# Altium PCB PCB1.PcbDoc (part 4 of 4)
Units mil, origin at the board's own origin, x right, y up, seen from the top; angles counter-clockwise.
Board outline 3904 x 3805 mil, 4 copper layers (Top Layer, Layer 2, Layer 3, Bottom Layer), stack 23.756 mil thick; 231 components, 342 nets, 1187 pads, 543 vias.
Unrouted connection lines stored in the file: 4.
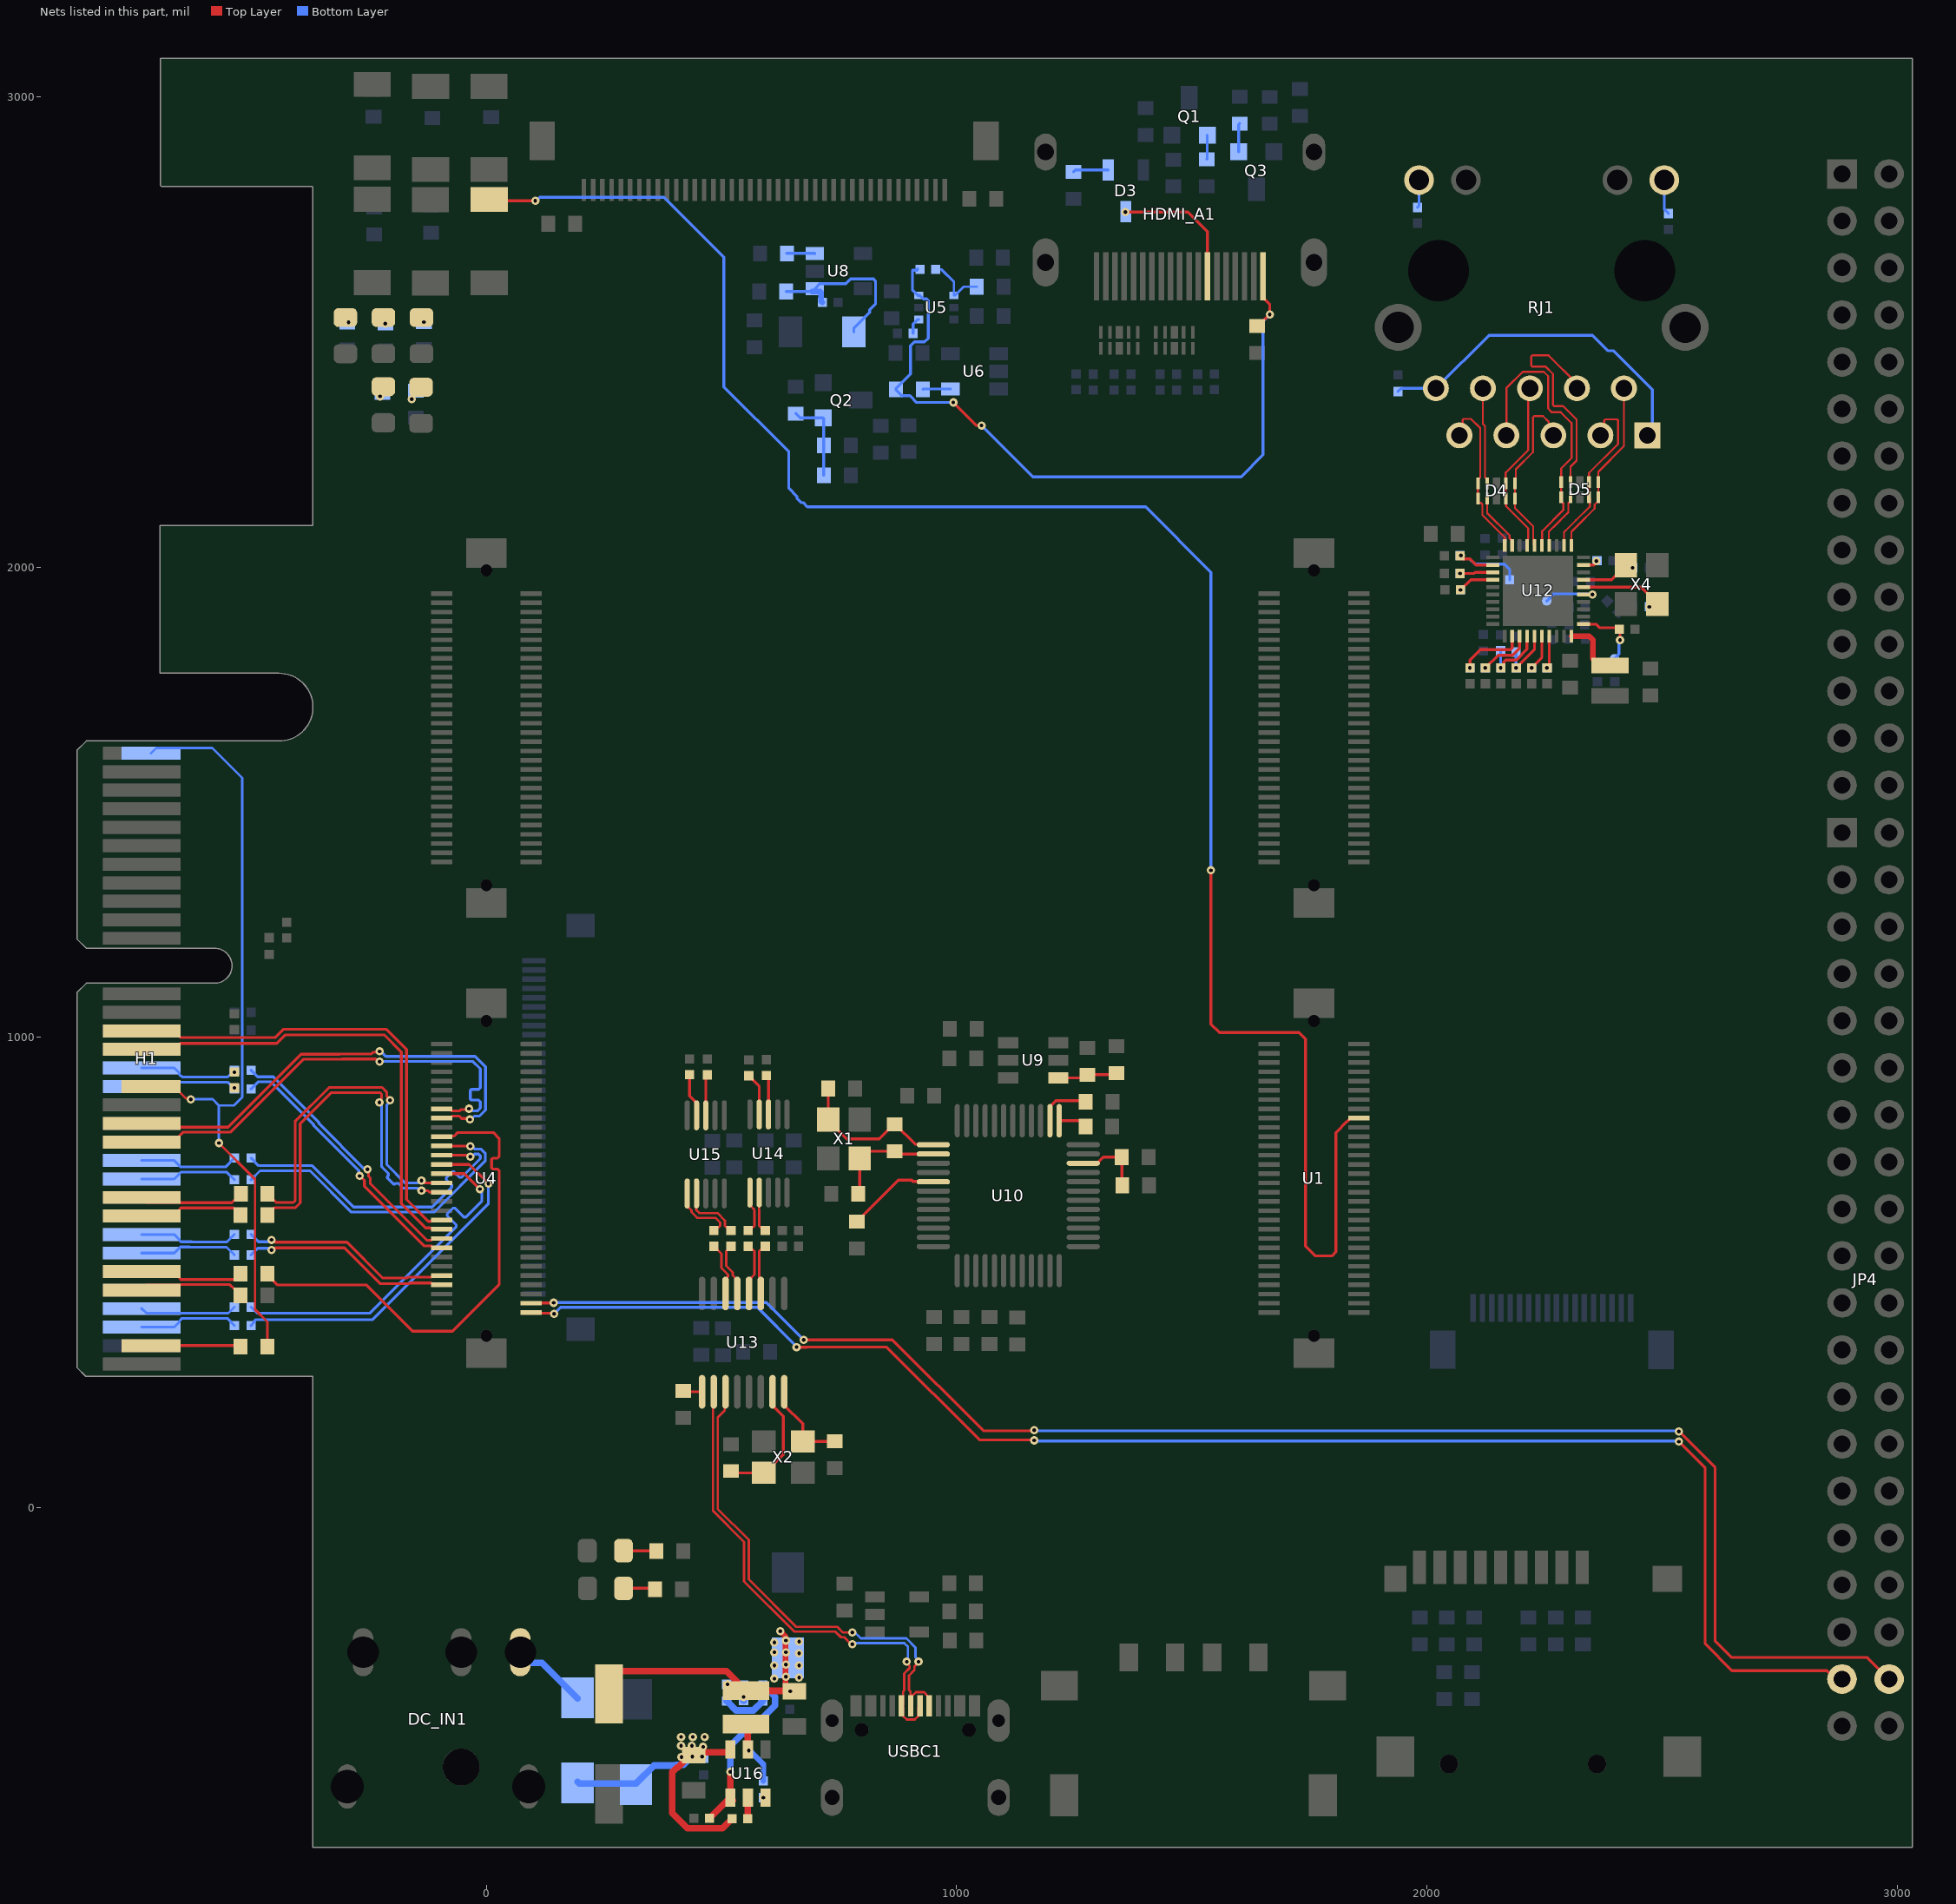
[diagram p6: the nets of this part, all layers, seen from the top]

## Via types
v1: diameter 17.7, hole 7.9, Top Layer to Bottom Layer, tented both sides, 543 vias

## Nets (pads, with @x,y where several pads share a name; then routed paths per layer and width w, separated by ;. In a path a pad name is that pad's centre, name@x,y a point inside that pad or via, vN(x,y) a via of type N, cw(c..) or ccw(c..) an arc to the next point about the centre after c; other vN are vias at no path point) (continued)
MGT_RX_N_0_R: H1.B28 R111.2 | length 225.5
  Top Layer w5.88: H1.B28@-733,462.28 -722.16,473.12 -650.7,473.12 -649.82,474 -546,474 -536.79,464.79 -534.82,464.79 -523,452.97 R111.2@-523,451
MGT_RX_N_1: R101.1 U4.27 | length 770
  Top Layer w5.88: R101.1@-465.91,622 -465.91,623.97 -454.09,635.79 -452.12,635.79 -450.12,637.79 -405.86,637.79 -396.04,647.61 -396.04,816.29 -329.9,882.43 -226.46,882.43 -223.02,878.98 -223.02,870.33 -223.85,869.5 -223.85,868.18 -227.64,864.39 v1(-227.64,861.19) ; v1(-138,673.6) -124.17,673.6 -121.04,670.46 U4.27@-95.46,670.46
  Bottom Layer w5.88: v1(-227.64,861.19) -227.64,857.99 -222.88,853.23 -222.88,724.49 -218.35,719.96 -216.27,717.89 -208.82,710.44 -208.82,705.56 -210.55,703.84 -210.55,700.6 -197.61,687.66 -194.37,687.66 -192.64,689.39 -187.77,689.39 -185.69,687.31 -177.39,679.01 -146.61,679.01 -141.2,673.6 v1(-138,673.6)
MGT_RX_N_1_R: H1.B24 R101.2 | length 226.4
  Top Layer w5.88: H1.B24@-733,619.76 -664.1,619.76 -653.26,630.6 -653.26,633.68 -649.82,637.12 -538.12,637.12 -536.79,635.79 -534.82,635.79 -523,623.97 R101.2@-523,622
MGT_RX_N_2: H1.B20 U4.45 | length 1013.8
  Top Layer w5.88: H1.B20@-733,777.24 -664.1,777.24 -653.26,788.08 -653.26,790.14 -649.33,794.07 -649.27,794.07 -645.34,798 -545,798 -390,953 -307.76,953 -307.05,953.71 -235.61,953.71 -229.88,947.98 v1(-227.32,947.98) ; U4.45@-95.46,847.63 -77.75,847.63 -73.34,843.22 -57.61,843.22 -54.67,846.17 -38.83,846.17 v1(-37,848)
  Bottom Layer w5.88: v1(-227.32,947.98) -226.95,948.35 -28.35,948.35 -12.88,932.88 -12.88,918.44 -12.88,892.62 -16.32,889.17 -32.07,889.17 -34.36,886.89 -34.36,868.58 -32.07,866.29 -16.32,866.29 -12.88,862.85 -12.88,857.77 -12.88,849.7 -19.33,843.25 -29.05,843.25 -33.8,848 v1(-37,848)
MGT_RX_N_3: H1.B15 U4.19 | length 1010.4
  Top Layer w5.88: H1.B15@-733,974.09 -664.1,974.09 -651.26,986.94 -445.73,986.94 -427.54,1005.12 -217.51,1005.12 -180.88,968.49 -180.88,646.2 -129.25,594.57 -119.37,594.57 -118.5,593.7 -97.45,593.7 U4.19@-95.47,591.72
MGT_RX_P_0: R110.1 U4.39 | length 1053.3
  Top Layer w5.88: R110.1@-465.91,497 -465.91,495.03 -443.88,473 -255,473 -157,375 -72,375 27,474 27,704 27,716.41 23.56,719.86 13.2,719.86 10.91,722.14 10.91,740.45 13.2,742.74 23.56,742.74 27,746.18 27,772 27,785 14.62,797.38 -61.08,797.38 -68.54,789.92 -94.12,789.92 U4.39@-95.46,788.57
MGT_RX_P_0_R: H1.B27 R110.2 | length 223.6
  Top Layer w5.88: H1.B27@-733,501.65 -664.1,501.65 -653.26,490.81 -653.26,488.32 -649.82,484.88 -534.82,484.88 -523,496.7 R110.2@-523,497
MGT_RX_P_1: R87.1 U4.29 | length 763.7
  Top Layer w5.88: R87.1@-465.46,667 -465.46,665.03 -453.63,653.21 -451.66,653.21 -447.13,648.67 -410.37,648.67 -406.92,652.12 -406.92,820.8 -334.41,893.31 -221.96,893.31 -212.14,883.49 -212.14,875.35 -205,868.22 v1(-205,866) ; v1(-138,695.3) -132.85,690.15 U4.29@-95.46,690.15
  Bottom Layer w5.88: v1(-205,866) -205,862.8 -212,855.8 -212,729 -172.89,689.89 -146.61,689.89 -141.2,695.3 v1(-138,695.3)
MGT_RX_P_1_R: H1.B23 R87.2 | length 224.1
  Top Layer w5.88: H1.B23@-733,659.13 -722.16,648.29 -650.11,648.29 -649.82,648 -541.54,648 -536.34,653.21 -534.37,653.21 -522.54,665.03 R87.2@-522.54,667
MGT_RX_P_2: H1.B19 U4.43 | length 1013.3
  Top Layer w5.88: H1.B19@-733,816.61 -725.27,808.88 -661.02,808.88 -549.51,808.88 -394.51,963.88 -312.27,963.88 -311.56,964.59 -244.6,964.59 -241.43,967.76 -229.24,967.76 v1(-227,970) ; U4.43@-95.46,827.94 -77.75,827.94 -73.34,832.34 -57.61,832.34 -52.53,827.26 -37.26,827.26 v1(-35,825)
  Bottom Layer w5.88: v1(-227,970) -224.73,970 -213.96,959.23 -23.84,959.23 -2,937.39 -2,845.19 -14.82,832.37 -25.65,832.37 -33.01,825 v1(-35,825)
MGT_RX_P_3: H1.B14 U4.21 | length 1007.8
  Top Layer w5.88: H1.B14@-733,1013.46 -664.1,1013.46 -649.85,999.21 -449.79,999.21 -432.33,1016.67 -212.72,1016.67 -170,973.95 -170,655 -123.49,608.49 -118.61,608.49 -117.68,609.42 -97.45,609.42 U4.21@-95.47,611.4
MGT_TX_N_0: C59.1 U4.33 | length 773
  Top Layer w5.88: U4.33@-95.46,729.52 -36.53,729.52 v1(4.25,688.73)
  Bottom Layer w5.88: C59.1@-500.57,387 -493.67,393.9 -493.67,396.12 -490.22,399.56 -241.82,399.56 3.97,645.35 3.97,688.45 v1(4.25,688.73)
MGT_TX_N_0_R: C59.2 H1.A30 | length 212.2
  Bottom Layer w5.88: H1.A30@-733,383.54 -664.1,383.54 -653.26,394.38 -653.26,396.38 -647.45,402.19 -551.19,402.19 C59.2@-536,387
MGT_TX_N_1: C57.1 U4.7 | length 448.5
  Top Layer w5.88: v1(-457,547.3) -453.8,547.3 -449.03,552.07 -301.69,552.07 -225.27,475.66 -164.63,475.66 -162.91,477.38 -116.95,477.38 -113.18,473.61 U4.7@-95.47,473.61
  Bottom Layer w5.88: C57.1@-500.57,537 -486.36,551.21 -464.11,551.21 -460.2,547.3 v1(-457,547.3)
MGT_TX_N_1_R: C57.2 H1.A26 | length 209.5
  Bottom Layer w5.88: H1.A26@-733,541.02 -664.1,541.02 -651.01,554.12 -630.93,554.12 -630.37,553.56 -552.56,553.56 C57.2@-536,537
MGT_TX_N_2: C55.1 U4.37 | length 703.3
  Top Layer w5.88: U4.37@-95.46,768.89 -34.89,768.89 v1(-34,768)
  Bottom Layer w5.88: C55.1@-500.57,697 -481.57,716 -375,716 -287.12,628.12 -111.31,628.12 -2.07,737.35 -2.07,752.44 -11.89,762.26 -25.06,762.26 -30.8,768 v1(-34,768)
MGT_TX_N_2_R: C55.2 H1.A22 | length 209.8
  Bottom Layer w5.88: H1.A22@-733,698.5 -664.1,698.5 -653.26,709.34 -653.26,709.56 -649.82,713 -552,713 C55.2@-536,697
MGT_TX_N_3: C53.1 U4.15 | length 571.3
  Top Layer w5.88: v1(-269.57,704.98) -268.83,704.98 -259.47,695.63 -259.47,683.42 -132.05,556.01 -116.84,556.01 -113.18,552.35 U4.15@-95.47,552.35
  Bottom Layer w5.88: C53.1@-500.57,890 -485.56,905.01 -458.01,905.01 -367.46,814.46 -367.46,812.37 -271.43,716.34 -271.43,706.85 v1(-269.57,704.98)
MGT_TX_N_3_R: C53.2 H1.A17 R86.2 | length 206.8
  Bottom Layer w5.88: H1.A17@-733,895.35 -723.79,904.56 -550.56,904.56 C53.2@-536,890
  other v1: -536,892.27
MGT_TX_P_0: C58.1 U4.31 | length 775.9
  Top Layer w5.88: U4.31@-95.47,709.83 -46.83,709.83 v1(-14,677)
  Bottom Layer w5.88: C58.1@-500.57,426 -488.01,413.44 -247.57,413.44 -66.51,594.51 -64.43,596.58 -64.43,601.46 -83.58,620.61 -83.58,623.85 -70.64,636.79 -67.4,636.79 -48.25,617.63 -43.38,617.63 -21.01,640.01 -9.91,651.1 -9.91,669.71 -14,673.8 v1(-14,677)
MGT_TX_P_0_R: C58.2 H1.A29 | length 206.4
  Bottom Layer w5.88: H1.A29@-733,422.91 -723.16,413.07 -548.93,413.07 C58.2@-536,426
MGT_TX_P_1: C56.1 U4.9 | length 449.2
  Top Layer w5.88: v1(-457,569) -453.8,569 -449.03,564.22 -296.66,564.22 -220.24,487.81 -169.67,487.81 -167.94,489.53 -116.95,489.53 -113.18,493.3 U4.9@-95.47,493.3
  Bottom Layer w5.88: C56.1@-500.57,581 -484.66,565.09 -464.11,565.09 -460.2,569 v1(-457,569)
MGT_TX_P_1_R: C56.2 H1.A25 | length 211.1
  Bottom Layer w5.88: H1.A25@-733,580.39 -664.1,580.39 -653.26,569.55 -653.26,568.44 -649.82,565 -626.42,565 -625.86,564.44 -552.56,564.44 C56.2@-536,581
MGT_TX_P_2: C54.1 U4.35 | length 704.9
  Top Layer w5.88: U4.35@-95.46,749.2 -40.73,749.2 -37.26,745.74 v1(-34.07,745.74)
  Bottom Layer w5.88: C54.1@-500.57,743 -484.45,726.88 -370.49,726.88 -282.61,639 -115.81,639 -75.91,678.91 -73.83,680.99 -73.83,685.86 -85.52,697.55 -85.52,700.79 -72.58,713.73 -69.35,713.73 -57.65,702.04 -52.78,702.04 -36.91,717.91 -12.95,741.86 -12.95,747.93 -16.4,751.38 -25.22,751.38 -30.87,745.74 v1(-34.07,745.74)
MGT_TX_P_2_R: C54.2 H1.A21 | length 210.6
  Bottom Layer w5.88: H1.A21@-733,737.87 -664.1,737.87 -650.23,724 -555,724 C54.2@-536,743
MGT_TX_P_3: C52.1 U4.17 | length 572
  Top Layer w5.88: v1(-253,719) -250.74,716.74 -250.74,704.41 -247.09,700.76 -247.09,688.55 -126.93,568.39 -116.84,568.39 -113.18,572.04 U4.17@-95.47,572.04
  Bottom Layer w5.88: C52.1@-500.57,930 -486.46,915.89 -453.5,915.89 -356.58,818.97 -356.58,816.87 -260.97,721.26 -255.26,721.26 v1(-253,719)
MGT_TX_P_3_R: C52.2 H1.A16 R86.1 | length 212.8
  Bottom Layer w5.88: H1.A16@-733,934.72 -664.1,934.72 -653.26,923.88 -653.26,920.83 -649.82,917.38 -648.76,917.38 -646.81,915.44 -613.34,915.44 -550.56,915.44 C52.2@-536,930
  other v1: -536,925.73
NetC6_1: C6.1 R23.1 U10.2 X1.1 | length 241.9
  Top Layer w6.16: C6.1@790.54,667 793.93,670.39 X1.1@793.93,742.32 809.06,757.46 R23.1@868,757.46 873.76,751.7 U10.2@950.43,751.7
NetC7_1: C7.1 R23.2 U10.1 X1.3 | length 338.1
  Top Layer w6.16: C7.1@727,891 X1.3@727,825 727,823.03 766.03,784 835.49,784 866.03,814.54 R23.2@868,814.54 869.97,814.54 912.19,772.32 949.5,772.32 U10.1@950.43,771.39
NetC9_2: C9.2 F1.1 R83.2 U8.1 | length 372.1
  Bottom Layer w6.16: C9.2@637.42,2586 692.81,2586 U8.1@698.41,2591.6 709.11,2602.3 764.13,2602.3 774.29,2612.46 823.39,2612.46 827.54,2608.31 827.54,2559.26 815.42,2547.14 815.42,2541.54 781.37,2507.5 F1.1@781.37,2500
  Bottom Layer w12: U8.1@692.81,2586 709.92,2586 712.1,2583.82 712.1,2565.17 R83.2@714.27,2563
NetC11_2: C11.2 Q2.1 R15.2 R16.1 | length 184.5
  Bottom Layer w6.16: C11.2@658,2326.46 667.46,2317 Q2.1@716,2317 717.46,2315.54 R15.2@717.46,2259 R16.1@717.46,2195
NetC14_1: C14.1 RJ1.1 RJ1.10 | length 740.1
  Bottom Layer w6.16: C14.1@1939,2373.28 1945.72,2380 RJ1.10@2019.29,2380 2132.29,2493 2352,2493 2385,2460 2397,2460 2480,2377 2480,2290.71 RJ1.1@2469.29,2280
NetC17_1: C17.1 U10.38 | length 112
  Top Layer w6.16: U10.38@1198.46,822.57 1198.46,852.49 1211.06,865.08 1237.83,865.08 1237.88,865.03 1272.43,865.03 C17.1@1274.46,863
NetC18_1: C18.1 U10.37 | length 61.6
  Top Layer w6.16: U10.37@1218.15,822.57 1262.32,822.57 1274,810.88 C18.1@1274,810
NetC19_2: C19.2 R32.1 U10.34 | length 147.9
  Top Layer w6.16: U10.34@1269.33,732.02 1299.25,732.02 1312.24,745 C19.2@1351.46,745 1351.46,686 R32.1@1352.46,685
NetC31_1: C31.1 U13.15 X2.3 | length 272
  Top Layer w6.16: C31.1@520.07,77.57 524.11,73.54 X2.3@590.12,73.54 592.08,73.54 631.45,112.91 631.45,194.35 608.53,217.28 U13.15@608.53,246
NetC32_1: C32.1 U13.16 X2.1 | length 190.2
  Top Layer w6.16: U13.16@633.53,246 633.53,217.28 672.79,178.01 X2.1@672.79,140.46 672.99,140.66 C32.1@741.07,140.66
NetC38_2: C38.2 U12.36 X4.3 | length 173.2
  Top Layer w6.16: U12.36@2333.26,1957.31 2456.02,1957.31 2490.26,1923.06 X4.3@2490.26,1921.09
  other v1: 2473.32,1915.43
NetC39_2: C39.2 U12.37 X4.1 | length 104
  Top Layer w6.16: U12.37@2333.26,1973.05 2392.62,1973.05 2400.82,1981.26 2402.79,1981.26 2423.34,2001.8 X4.1@2423.34,2003.77
  other v1: 2437.88,1998.43
NetC41_2: C41.2 R98.2 R100.2 U12.12 | length 208.4
  Top Layer w6.16: R98.2@2077.49,2017.24 2091.76,2017.24 2104.45,2004.55 U12.12@2140.34,2004.55
  Bottom Layer w6.16: R100.2@2072.48,2025.97 v1(2072.48,2024.43) 2072.48,2024.23 2077.7,2019 2077.7,2017.67 2091.33,2017.67 2103,2006 2165,2006 2176.28,1994.72 C41.2@2176.28,1973
NetC60_1: C60.1 L2.1 U16.2 | length 126.6
  Top Layer w14: U16.2@556,-514.82 556,-471 L2.1@559,-468
  Bottom Layer w12: v1(558,-517) 560,-517 589,-546 C60.1@589,-581.57
NetC60_2: C60.2 U16.6 | length 4.5
  Top Layer w12: v1(589,-617) 589.18,-617.18 U16.6@593.4,-617.18
NetC61_2: C61.2 C62.2 C63.1 C64.1 D7.1 L2.2 R115.2 | length 590.4
  Top Layer w12: v1(625,-263) 636,-274 636,-381 C62.2@645.08,-390.08
  Top Layer w14: C61.2@261,-396.7 261,-370.53 283.53,-348 510.43,-348 L2.2@552,-389.57 552.51,-390.08 645.08,-390.08 646.08,-390.08 C62.2@649,-393
  Bottom Layer w12: C63.1@645,-393.57 645,-392 v1(646,-391)
  Bottom Layer w14: C64.1@511,-376.28 512.72,-376.28 v1(513,-376) ; R115.2@547,-410.73 v1(547,-403)
  other v1: 612.38,-364 665,-362 637,-360 612.38,-336 665,-336 637,-334 665,-310 612.38,-308 637,-308 612.38,-287 665,-285 637,-283
NetC64_2: C64.2 R113.2 | length 94
  Bottom Layer w14: C64.2@511,-411.72 530.86,-431.57 567.89,-431.57 R113.2@588,-411.46 R113.2@588,-411
NetC65_2: C65.2 C66.1 D6.2 D8.2 R114.2 U16.3 | length 670.4
  Top Layer w14: v1(438,-530) 438,-529.6 C65.2@441,-526.6 433.5,-526.6 407.31,-552.8 404.9,-552.8 395,-562.7 395,-649.97 427.03,-682 502.27,-682 R114.2@522.27,-662 ; C65.2@446.2,-531.8 C65.2@449,-529 ; C65.2@459,-526.6 459,-520.71 514.77,-520.71 516,-519.48 U16.3@516,-509
  Bottom Layer w14: D8.2@194,-583.58 197.58,-587.17 318,-587.17 356.28,-548.89 402.11,-548.89 403.44,-547.56 419.44,-547.56 437,-530 v1(438,-530) 438.71,-530.71 459.16,-530.71 C66.1@459.16,-530.44
  other v1: 415,-531 459,-530 461,-509 414,-507 437,-507 414,-488 439,-488 464,-488
NetD3_1: D3.1 R9.1 | length 75.2
  Bottom Layer w6.16: R9.1@1248.69,2840.54 1252.43,2844.29 D3.1@1322.28,2844.29
NetD3_3: D3.3 HDMI_A1.13 | length 288.3
  Top Layer w6.16: v1(1359,2755.02) 1492.02,2755.02 1533.69,2713.36 HDMI_A1.13@1533.69,2618
  Bottom Layer w6.16: v1(1359,2755.02) D3.3@1359.69,2755.71
NetD8_1: D8.1 DC_IN1.4 | length 168
  Bottom Layer w14: DC_IN1.4@72.2,-307.75 72.2,-316.77 85.74,-330.3 117.88,-330.3 D8.1@194,-406.42
NetH1_B31: H1.B31 R112.2 | length 191.2
  Top Layer w6.16: H1.B31@-713.32,344.17 -525.17,344.17 R112.2@-523,342
NetHDMI_A1_19: HDMI_A1.19 R11.2 R13.2 R75.1 U5.3 | length 1633.5
  Top Layer w6.16: v1(993,2350) 1042,2301 v1(1053,2301) ; R11.2@1639,2512.54 1640.97,2512.54 1665.43,2537 v1(1666,2537) 1666,2558.52 1651.8,2572.72 HDMI_A1.19@1651.8,2618
  Bottom Layer w6.16: R75.1@917,2634 917,2632.44 915.51,2630.95 906,2630.95 906,2589.19 917.6,2577.59 921.6,2577.59 929.19,2570 935.99,2570 939.6,2566.39 939.6,2486.6 931.81,2478.81 909.85,2478.81 902,2470.97 902,2410.51 871.46,2379.97 R13.2@871.46,2378 871.46,2376.03 883.14,2364.35 900.69,2364.35 915.03,2350 v1(993,2350) ; v1(1053,2301) 1162,2192 1605,2192 1651.53,2238.53 1651.53,2522.53 v1(1666,2537)
NetL1_1: L1.1 U12.30 | length 119.9
  Top Layer w12: U12.30@2307.67,1852.98 2345.26,1852.98 2353.51,1844.72 2353.51,1804.57 2363.64,1794.43 L1.1@2379.8,1794.43
NetLED1_1: LED1.1 R48.1 | length 68
  Top Layer w6.16: LED1.1@291.8,-172 357,-172 R48.1@359,-174
NetLED2_1: LED2.1 R49.1 | length 70.5
  Top Layer w6.16: LED2.1@291.4,-92 360.45,-92 R49.1@361.46,-93
NetLED3_1: LED3.1 R50.1
  other v1: -215,2517.67
NetLED4_1: LED4.1 R51.1
  other v1: -133,2520.67
NetLED5_1: LED5.1 R52.1
  other v1: -159.01,2356.87
NetLED6_1: LED6.1 R53.1
  other v1: -226,2363
NetLED7_1: LED7.1 R54.1
  other v1: -293,2520.54
NetQ1_1: Q1.1 R17.2 | length 51.3
  Bottom Layer w6.16: R17.2@1532,2867.09 1533,2868.09 Q1.1@1533,2918
NetQ3_1: Q3.1 R27.2 | length 60.9
  Bottom Layer w6.16: Q3.1@1599.79,2883.02 1599.79,2940.79 R27.2@1602,2943
NetR12_1: R12.1 R75.2 U5.4 | length 122.2
  Bottom Layer w5.24: 967.54,2633 994.4,2606.14 U5.4@994.4,2577.59 996.4,2577.59 1014.81,2596 R12.1@1042.46,2596
NetR13_1: R13.1 U6.4 | length 58.5
  Bottom Layer w6.16: R13.1@928.54,2378 929.14,2378.6 U6.4@986.82,2378.6
NetR14_1: R14.1 R19.2 U9.1 | length 127.8
  Top Layer w6.16: U9.1@1216.31,913.6 1271.15,913.6 R19.2@1278,920.46 1337,920.46 R14.1@1340,923.46
NetR18_2: R18.2 U8.3 | length 59.8
  Bottom Layer w6.16: R18.2@638.87,2667 697.81,2667 U8.3@698.41,2666.4
NetR25_2: R25.2 RJ1.11 | length 74.9
  Bottom Layer w6.16: RJ1.11@2505.12,2822.91 2505.12,2760.61 R25.2@2514,2751.73
NetR26_2: R26.2 RJ1.14 | length 59.6
  Bottom Layer w6.16: R26.2@1980,2764.73 1983.46,2768.2 RJ1.14@1983.46,2822.91
NetR28_2: R28.2 U10.5 | length 201.5
  Top Layer w6.16: R28.2@788,607.67 789.97,607.67 801.65,619.35 801.65,621.32 876.26,695.93 904.6,695.93 906.95,693.58 949.5,693.58 U10.5@950.43,692.65
NetR58_2: R58.2 U13.9 | length 40.6
  Top Layer w6.16: R58.2@418.53,247.54 420.07,246 U13.9@458.53,246
NetR60_1: R60.1 U12.39 | length 33.3
  Top Layer w6.16: U12.39@2333.26,2004.55 2354.92,2004.55 2360.47,2010.1 v1(2360.47,2012.44)
  Bottom Layer w6.16: v1(2360.47,2012.44) 2360.47,2011.42 R60.1@2360.8,2011.09
NetR72_1: R72.1 U14.9 | length 91.6
  Top Layer w6.16: R72.1@558,918.27 580.16,896.11 U14.9@580.16,835.89
NetR73_1: R73.1 U14.8 | length 84.8
  Top Layer w6.16: R73.1@595.4,918.81 599.84,914.37 U14.8@599.84,835.89
NetR74_2: R74.2 U5.1 | length 35.5
  Bottom Layer w6.16: R74.2@907.73,2497 907.73,2516.54 917.6,2526.41 U5.1@919.6,2526.41
NetR76_1: R76.1 U15.9 | length 71.3
  Top Layer w6.16: R76.1@432,920.27 432,875.11 446.84,860.27 U15.9@446.84,855.16
NetR77_2: R77.2 R81.2 U12.13 | length 70.6
  Top Layer w6.16: v1(2070.74,1986.43) R81.2@2070.94,1986.43 2100.43,1986.43 2102.8,1988.8 U12.13@2140.34,1988.8
NetR78_1: R78.1 U15.8 | length 87.5
  Top Layer w6.16: U15.8@466.53,833.89 466.53,917.02 R78.1@469.65,920.14
NetR79_2: R79.2 R80.2 U12.14 | length 77.6
  Top Layer w6.16: v1(2071.74,1951.43) R80.2@2071.94,1951.43 2093.56,1973.05 U12.14@2140.34,1973.05
NetR82_2: R82.2 TP2.1 U12.31 | length 148.4
  Top Layer w6.16: U12.31@2333.26,1878.57 2333.66,1878.16 2360.39,1878.16 2367.78,1870.77 2406.49,1870.77 R82.2@2409.27,1868 ; v1(2410.88,1844.43) R82.2@2410.88,1868
  Bottom Layer w6.16: TP2.1@2399,1805 2408.79,1814.79 2408.67,1814.92 2408.67,1842.22 v1(2410.88,1844.43)
NetR113_1: R113.1 R115.1 R116.1 U16.4 | length 405.2
  Top Layer w14: R116.1@474.73,-661 512.73,-623 U16.4@524,-623 ; U16.4@518.6,-617.18 518.6,-562.4 v1(519,-562)
  Bottom Layer w14: v1(519,-562) 519,-507 545,-481 553.71,-481 614,-420.71 614,-402.22 602.4,-390.62 600.62,-390.62 589,-379 R113.1@589,-377 ; R115.1@544,-378 R113.1@588,-378
NetR114_1: R114.1 U16.5 | length 37.8
  Top Layer w14: R114.1@556,-655 U16.5@556,-617.18
NetTP1_1: TP1.1 U12.35 | length 123.7
  Top Layer w6.16: U12.35@2333.26,1941.56 2333.35,1941.47 2352.41,1941.47 v1(2352.5,1941.38)
  Bottom Layer w6.16: TP1.1@2255,1928 2270,1943 2350.88,1943 v1(2352.5,1941.38)
PCIE_PRSNT: H1.A1 H1.B17 R112.1 | length 1677.1
  Top Layer w5.24: H1.B17@-713.32,895.35 -664.1,895.35 -639.13,870.38 -631.38,870.38 v1(-629,868) ; v1(-569,775) -492,698 -492,421 -465.91,394.91 R112.1@-465.91,342
  Bottom Layer w5.24: H1.A1@-713.32,1604.02 -702.33,1615 -583,1615 -519.54,1551.54 -519.54,872.46 -537,855 -569,855 ; v1(-629,868) -582,868 -569,855 ; v1(-569,775) -569,855
PHY2_MDI0N: D5.4 D5.7 RJ1.3 U12.2 | length 381.3
  Top Layer w4.29: U12.2@2291.92,2045.89 2291.92,2073.92 2295.07,2077.07 2317.32,2099.32 2346.72,2128.72 2346.72,2146.79 D5.4@2344.93,2148.59 D5.7@2344.93,2180.99 2344.93,2199.93 2407,2262 2407,2311.48 2404.49,2313.99 2379.82,2313.99 2377.31,2311.48 2377.31,2288.01 RJ1.3@2369.29,2280
PHY2_MDI0P: D5.5 D5.6 RJ1.2 U12.1 | length 380.3
  Top Layer w4.29: U12.1@2307.67,2045.89 2307.67,2075.11 2321.59,2089.03 2357.01,2124.46 2357.01,2132.46 2364.61,2140.06 D5.5@2364.61,2148.59 D5.6@2364.61,2180.99 2364.61,2202.61 2419.29,2257.29 RJ1.2@2419.29,2380
PHY2_MDI1N: D5.1 D5.10 RJ1.7 U12.5 | length 628.9
  Top Layer w4.29: RJ1.7@2169.29,2280 2169.29,2380.29 2204,2415 2249,2415 2258,2406 2258,2337 2266,2329 2285,2329 2308,2306 2308,2232 2285.87,2209.87 D5.10@2285.87,2180.99 D5.1@2285.87,2148.59 2285.87,2140.06 2290.25,2135.68 2290.25,2121.25 2245.48,2076.48 2245.48,2046.69 U12.5@2244.67,2045.89
PHY2_MDI1P: D5.2 D5.9 RJ1.4 U12.4 | length 627.2
  Top Layer w4.29: U12.4@2260.42,2045.89 2259.62,2046.69 2259.62,2075.24 2277.88,2093.51 2277.95,2093.51 2292.43,2107.99 2301.18,2116.73 2301.18,2135.68 2305.56,2140.06 D5.2@2305.56,2148.59 D5.9@2305.56,2180.99 2305.56,2213.56 2318.56,2226.56 2318.56,2313.44 2289.82,2342.18 2270.8,2342.18 2268.29,2344.69 2268.29,2410.71 2253,2426 2224.51,2426 2222,2428.51 2222,2447.49 2224.51,2450 2259,2450 2319.29,2389.71 RJ1.4@2319.29,2380
PHY2_MDI2N: D4.4 D4.7 RJ1.6 U12.7 | length 376.3
  Top Layer w4.29: U12.7@2213.18,2045.89 2214.97,2047.68 2214.97,2059.26 2215.75,2060.04 2215.75,2082.25 2168.63,2129.37 2168.63,2144.88 D4.4@2167.93,2145.59 D4.7@2167.93,2177.99 2167.93,2200.93 2215.71,2248.71 2215.71,2376.42 RJ1.6@2219.29,2380
PHY2_MDI2P: D4.5 D4.6 RJ1.5 U12.6 | length 377.9
  Top Layer w4.29: U12.6@2228.93,2045.89 2227.13,2047.68 2227.13,2059.26 2226.36,2060.04 2226.36,2086.64 2187.61,2125.39 D4.5@2187.61,2145.59 D4.6@2187.61,2177.99 2189.41,2179.78 2189.41,2207.85 2226,2244.45 2226,2318.49 2228.51,2321 2247,2321 2259.57,2308.43 2259.57,2289.73 RJ1.5@2269.29,2280
PHY2_MDI3N: D4.1 D4.10 RJ1.9 U12.10 | length 360.1
  Top Layer w4.29: RJ1.9@2069.29,2280 2076,2286.71 2076,2312.49 2078.51,2315 2094,2315 2113.57,2295.43 2113.57,2190.82 2111.06,2188.3 2110.67,2188.3 2108.87,2186.51 D4.10@2108.87,2177.99 2108.87,2137.98 2110.67,2136.19 2115.41,2136.19 2118.27,2133.34 2118.27,2110.43 2165.88,2062.82 U12.10@2165.93,2045.89 U12.10@2165.93,2045.89
PHY2_MDI3P: D4.2 D4.9 RJ1.8 U12.9 | length 360.2
  Top Layer w4.29: RJ1.8@2119.29,2380 2119.29,2304.26 2123.86,2299.69 2123.86,2190.82 2126.37,2188.3 2126.77,2188.3 2128.56,2186.51 D4.9@2128.56,2177.99 2128.56,2114.69 2176.17,2067.08 2176.17,2061.24 2181.68,2055.73 U12.9@2181.68,2045.89
PHY_RXCLK/PHYAD1: R68.2 R108.1 U12.27 | length 69.5
  Top Layer w6.16: R68.2@2255.8,1785.43 2260.42,1790.05 U12.27@2260.42,1852.98
  other v1: 2255.6,1785.43
PHY_RXCLK/PHYAD2: R70.2 R109.2 U12.26 | length 76.5
  Top Layer w6.16: R70.2@2223,1785.43 2244.67,1807.11 U12.26@2244.67,1852.98
  other v1: 2222.8,1785.43
PHY_RXD0/RXDLY: R59.2 R102.2 R103.1 U12.25 | length 118.6
  Top Layer w6.16: R59.2@2190.2,1785.43 2228.93,1824.16 U12.25@2228.93,1852.98
  Bottom Layer w6.16: R102.2@2190,1819.27 v1(2190,1785.43) R103.1@2190.8,1786.23
PHY_RXD1/TXDLY: R61.2 R104.2 R105.1 U12.24 | length 140.7
  Top Layer w6.16: R61.2@2157.4,1785.43 2164.16,1792.2 2164.16,1798.75 2167.77,1802.36 2190.72,1802.36 2213.18,1824.81 U12.24@2213.18,1852.98
  Bottom Layer w6.16: R104.2@2157,1822 2157,1785.63 v1(2157.2,1785.43)
PHY_RXD2/PLLOFF: R62.2 R106.1 U12.23 | length 115.9
  Top Layer w6.16: R62.2@2124.6,1785.43 2151.68,1812.52 2182.74,1812.52 2197.43,1827.2 U12.23@2197.43,1852.98
  other v1: 2124.4,1785.43
PHY_RXD3/PHYD0: R64.2 R107.1 U12.22 | length 142.4
  Top Layer w6.16: R64.2@2091.8,1785.43 2091.8,1802.43 2113.8,1824.43 2178.07,1824.43 2181.68,1828.04 U12.22@2181.68,1852.98
  other v1: 2091.6,1785.43
RESET: SW6.2 U1.44 | length 4081.5
  Top Layer w6.16: SW6.2@12,2786 19,2779 v1(104,2779) ; v1(1541,1355) 1541,1028 1559,1010 1728,1010 1742,996 1742,556 1763,535 1798,535 1806.76,543.76 1806.76,797.12 1830.11,820.47 1830.28,820.47 1837.75,827.94 U1.44@1855.47,827.94
  Bottom Layer w6.16: v1(104,2779) 106.38,2779 113.38,2786 378,2786 504.92,2659.08 504.92,2383.08 643,2245 643,2167.61 660.37,2150.24 660.37,2146.21 669.7,2136.88 673.73,2136.88 682.61,2128 1402,2128 1541,1989 v1(1541,1355)
UART1_D+: R66.2 U14.1 | length 91.9
  Top Layer w5.1: R66.2@556.93,588.73 564.22,596.02 566.93,596.02 569.91,599.01 569.91,629.74 569.47,630.18 569.47,633.75 560.47,642.75 U14.1@560.47,669.75
UART1_D+_R: R66.1 U13.4 | length 112
  Top Layer w5.1: R66.1@556.93,555.27 564.22,547.98 566.93,547.98 569.91,544.99 569.91,526.2 569.98,526.14 569.98,495.21 558.53,483.76 U13.4@558.53,455.05
UART1_D-: R67.2 U14.2 | length 88.4
  Top Layer w5.1: U14.2@580.16,669.75 579.57,669.16 579.57,634.37 580.01,633.93 580.01,599.01 583,596.02 585.71,596.02 R67.2@593,588.73
UART1_D-_R: R67.1 U13.3 | length 108.6
  Top Layer w5.1: U13.3@583.53,455.05 583.53,486.18 580.08,489.63 580.08,530.32 580.01,530.39 580.01,544.99 583,547.98 585.71,547.98 R67.1@593,555.27
UART2_D+: R63.2 U15.1 | length 137.8
  Top Layer w5.1: U15.1@427.16,667.75 427.16,640.75 436.15,631.75 436.15,628.18 448.32,616.01 487.08,616.01 497.11,605.98 497.11,599.01 494.13,596.02 491.29,596.02 R63.2@484,588.73
UART2_D+_R: R63.1 U13.6 | length 114.8
  Top Layer w5.1: R63.1@484,555.27 499.9,539.37 499.9,509.41 513.87,495.43 513.87,491.21 508.53,485.86 U13.6@508.53,455.05
UART2_D-: R65.2 U15.2 | length 134.3
  Top Layer w5.1: U15.2@446.84,667.75 446.25,667.16 446.25,632.37 452.51,626.11 491.27,626.11 507.21,610.17 507.21,599.01 510.2,596.02 513.03,596.02 R65.2@520.33,588.73
UART2_D-_R: R65.1 U13.5 | length 114.2
  Top Layer w5.1: R65.1@520.33,555.27 510,544.94 510,513.59 523.97,499.62 523.97,493.31 533.53,483.76 U13.5@533.53,455.05
USB_DM: U13.10 USBC1.A7 USBC1.B7 | length 1060.4
  Top Layer w5.1: U13.10@483.53,246 481.82,244.3 481.82,-7.11 547.9,-73.18 547.9,-157.18 654.72,-264 742.09,-264 754.19,-276.1 761.26,-276.1 776.16,-291 v1(778,-291) ; v1(894,-328) 894,-331.17 900.11,-337.29 900.11,-341.51 888.43,-353.2 888.43,-389.14 886.03,-391.54 886.03,-418.48 USBC1.B7@882.68,-421.83 886.03,-425.18 886.03,-443.22 893.75,-450.94 910.99,-450.94 918.69,-443.24 918.69,-425.18 USBC1.A7@922.05,-421.82
  Bottom Layer w5.1: v1(778,-291) 780.41,-288.59 888.91,-288.59 896.41,-296.09 896.41,-325.59 v1(894,-328)
USB_DP: U13.11 USBC1.A6 USBC1.B6 | length 1069
  Top Layer w5.1: U13.11@508.53,246 506.82,244.3 506.82,206.02 491.92,191.12 491.92,-2.92 558,-69 558,-153 658.9,-253.9 746.27,-253.9 758.37,-266 v1(778,-266) ; v1(919,-328) 919,-329.84 910.21,-338.62 910.21,-345.7 898.53,-357.38 898.53,-388.28 901.72,-391.47 901.72,-421.11 USBC1.A6@902.37,-421.76 905.72,-418.4 905.72,-400.34 913.43,-392.63 930.67,-392.63 934.5,-396.46 934.5,-397.79 941.74,-405.02 USBC1.B6@941.74,-421.76
  Bottom Layer w5.1: v1(778,-266) 780.41,-268.41 786.04,-268.41 796.12,-278.49 893.1,-278.49 912.7,-298.09 912.7,-318.29 919,-324.59 v1(919,-328)
XADC_V_N: JP4.37 U4.2 | length 3342.5
  Top Layer w6.16: U4.2@95.47,414.56 96.75,413.28 142.72,413.28 v1(144,412) ; v1(659.52,341.06) 660.1,340.47 681.46,340.47 682.04,341.06 851.1,341.06 1048.48,143.68 1163.93,143.68 v1(1165,142.61) ; v1(2536,140) 2592,84 2592,-290 2649,-347 2851.05,-347 2869.05,-365 JP4.37@2883.07,-365
  Bottom Layer w6.16: v1(144,412) 157.5,425.5 576.5,425.5 660,342 660,341.54 v1(659.52,341.06) ; v1(1165,142.61) 1166.46,141.15 2534.85,141.15 v1(2536,140)
XADC_V_P: JP4.38 U4.4 | length 3436.9
  Top Layer w6.16: U4.4@95.47,434.24 96.05,434.82 142.42,434.82 v1(143,435.39) ; v1(674.86,356.4) 863.6,356.4 1057,163 1163.69,163 v1(1165,164.32) ; v1(2536,161.7) 2536.83,161.7 2613,85.53 2613,-283.16 2648.84,-319 2937.07,-319 JP4.38@2983.07,-365
  Bottom Layer w6.16: v1(143,435.39) 143.27,435.66 595.6,435.66 v1(674.86,356.4) ; v1(1165,164.32) 1166.46,162.85 2534.85,162.85 v1(2536,161.7)
pads on no net: D3.2 DC_IN1. FPC1.38 FPC1.39 H1.A5 H1.A6 H1.A7 H1.A8 H1.A19 H1.A32 H1.B3 H1.B5 H1.B6 H1.B9 H1.B10 H1.B11 H1.B12 H1.B30 HDMI_A1.14 RJ1.BO3 RJ1.BO4 U1. U2. U3. U4. U5.6 U7.4 U10.17 U10.18 U10.19 U10.20 U10.21 U10.25 U10.26 U10.27 U10.28 U10.29 U10.30 U10.31 U10.32 U10.33 U10.42 U11.0@2047.17,-545.7 U11.0@2362.13,-545.7 U14.4 U14.5 U14.6 U15.4 U15.5 U15.6 USBC1. USBC1.A5 USBC1.A8 USBC1.B5 USBC1.B8 X3.2 X3.19 X3.20
copper on no net: | length 49.4
  Bottom Layer w12: v1(2155,-339) 2158.5,-335.5 2158.5,-291.09

## Polygon pours and split planes (outlines as drawn)
GND on Top Layer "GND_L01_P047" (solid, remove dead copper, pour order 47): -693,3082 3033,3082 3033,-723 -369,-723 -369,279 -371,281 -694,281 -694,1774 -694,2088 -370,2088 -369,2089 -369,2808 -690,2808 -693,2811
1V05_AVDD_GMII on Top Layer "1V05_AVDD_GMII_L01_P046" (solid, remove dead copper, pour order 46): 2459,1769 2608,1769 2638,1799 2638,2073 2591,2120 2379,2120 2346.62,2087.62 2346.62,1997.62 2344,1995 2319,1995 2319,1983 2322,1980 2393,1980 2400,1987 2399,1988 2399,2043 2401,2043 2419,2061 2523,2061 2544,2040 2544,1832 2528,1816 2460.52,1816
1V05_DVDD_GMII on Top Layer "1V05_DVDD_GMII_L01_P044" (solid, remove dead copper, pour order 44): 2350,1743 2493,1743 2493,1712 2487,1706 2350,1706
+3.3_AVDD_GMII on Top Layer "+3.3_AVDD_GMII_L01_P043" (solid, remove dead copper, pour order 43): 2051,2054 2090,2015 2152,2015 2154,2017 2154,2024 2147,2024 2084,2087 2051,2087
+3.3_AVDD_GMII on Top Layer "+3.3_AVDD_GMII_L01_P041" (solid, remove dead copper, pour order 41): 2319,2016 2347,2016 2347,2048 2343,2052 2323,2052 2319,2048
NetL1_1 on Top Layer "NETL1_1_L01_P039" (solid, remove dead copper, pour order 39): 2303.8,1866.43 2370.8,1866.43 2428.8,1808.43 2428.8,1774.43 2350.8,1774.43 2350.8,1807.43 2336.8,1807.43 2303.8,1840.43
+3.3_DVDD_GMII on Top Layer "+3.3_DVDD_GMII_L01_P037" (solid, remove dead copper, pour order 37): 2271.8,1866.43 2272.8,1865.43 2272.8,1791.43 2277.8,1786.43 2321.8,1786.43 2321.8,1815.43 2295.8,1841.43 2295.8,1866.43
NetC61_2 on Top Layer "NETC61_2_L01_P026" (solid, remove dead copper, pour order 26): 342,-409 291,-460 290,-459 231,-459 231,-241 277,-195 676,-195 684,-203 683,-204 683,-409
GND on Top Layer "GND_L01_P032" (solid, remove dead copper, pour order 32): 583,-496 631,-448 680,-448 681,-449 681,-538 586,-538 583,-535
+3.3_board on Top Layer "+3.3_BOARD_L01_P029" (solid, remove dead copper, pour order 29): 903,-96 995,-96 1009,-110 1009,-299 973,-299 972,-300 899,-300
GND on Top Layer "GND_L01_P028" (solid, remove dead copper, pour order 28): 1027,-143 1027,-402 1025,-404 1026,-405 1052,-405 1052,-314 1062,-304 1061,-303 1061,-145
+5 on Top Layer "+5_L01_P027" (solid, remove dead copper, pour order 27): 745,-146 858,-146 889,-177 889,-302 842,-349 842,-386 829,-399 829,-408 808,-408 806,-406 806,-258 781,-233 745,-233
NetC60_1 on Top Layer "NETC60_1_L01_P025" (solid, remove dead copper, pour order 25): 545,-534 545,-509 516,-480 503,-480 503,-441 601,-441 601,-480 586,-495 567,-495 567,-535
NetC65_2 on Top Layer "NETC65_2_L01_P024" (solid, remove dead copper, pour order 24): 529,-495 508,-495 490,-477 375,-477 360,-492 360,-683 391,-714 527,-714 541,-700 541,-649 540,-649 535,-644 513,-644 487,-670 431,-670 431,-666 415,-650 415,-566 419,-566 433,-552 491,-552 508,-535 529,-535
12V_PCIE on Top Layer "12V_PCIE_L01_P021" (solid, remove dead copper, pour order 21): -651,1618 -584,1618 -577,1611 -577,1515 -582,1510 -644,1510 -650,1516 -650,1551 -651,1551
3V3_PCIE on Top Layer "3V3_PCIE_L01_P011" (solid, remove dead copper, pour order 11): -651,1342 -484,1342 -415,1273 -415,1236 -434,1236 -443,1245 -637,1245 -652,1260 -652,1337.45
GND on Bottom Layer "GND_L04_P048" (solid, remove dead copper, pour order 48): -693,3083 3033,3083 3033,-722 -369,-722 -369,280 -371,282 -694,282 -694,1775 -694,2089 -370,2089 -369,2090 -369,2809 -690,2809 -693,2812
1V05_DVDD_GMII on Bottom Layer "1V05_DVDD_GMII_L04_P042" (solid, remove dead copper, pour order 42): 2429,1710 2427,1710 2389,1672 2054,1672 2034,1692 2034,1843 2043,1852 2130,1852 2130,1812 2129,1811 2097,1811 2080,1794 2080,1724 2099,1705 2342,1705 2350,1713 2350,1743 2429,1743
1V05_AVDD_GMII on Bottom Layer "1V05_AVDD_GMII_L04_P045" (solid, remove dead copper, pour order 45): 2338,1960 2338,1963 2321,1980 2229,1980 2190,2019 2190,2075 2193,2078 2289,2078 2310,2057 2309,2056 2309,2014 2323,2000 2374,2000 2382,1992 2382,1960
+3.3_AVDD_GMII on Bottom Layer "+3.3_AVDD_GMII_L04_P040" (solid, remove dead copper, pour order 40): 2050,2055 2101,2055 2123,2077 2124,2076 2293,2076 2310,2059 2310,2023 2315,2018 2347,2018 2347,2019 2352,2024 2352,2111 2331,2132 2063,2132 2050,2119
+3.3_DVDD_GMII on Bottom Layer "+3.3_DVDD_GMII_L04_P038" (solid, remove dead copper, pour order 38): 2255.8,1855.43 2311.8,1855.43 2321.8,1845.43 2321.8,1785.43 2288.8,1785.43 2255.8,1818.43
+5 on Bottom Layer "+5_L04_P030" (solid, remove dead copper, pour order 30): -150,467 -149,466 78,466 78,456 169,365 263,365 292,336 292,262 277,247 -148,247 -168,267 -168,447
3V3_PCIE on Bottom Layer "3V3_PCIE_L04_P010" (solid, remove dead copper, pour order 10): -661,1302 -617,1302 -617,1238 -619,1236 -661,1236
12V_PCIE on Bottom Layer "12V_PCIE_L04_P020" (solid, remove dead copper, pour order 20): -659,1511 -658,1512 -581,1512 -581,1612 -584,1615 -637,1615 -660.5,1591.5
NetC65_2 on Bottom Layer "NETC65_2_L04_P023" (solid, remove dead copper, pour order 23): 149,-538 149,-528 197,-480 464,-480 482,-498 482,-547 471,-558 385,-558 385,-626 367,-644 148,-644
NetD8_1 on Bottom Layer "NETD8_1_L04_P022" (solid, remove dead copper, pour order 22): 42,-247 207,-247 239,-279 239,-458 230,-467 40,-467
+3.3_board on Layer 3 "+3.3_BOARD_L03_P019" (solid, remove dead copper, pour order 19): -424,1630 -568,1774 -694,1774 -694,2088 -369,2088 -369,2809 -691,2809 -693,2811 -693,3082 3033,3082 3034,3081 3033,-723 3032,-723 -369.02,-723
+5 on Layer 3 "+5_L03_P018" (solid, remove dead copper, pour order 18): 384,-723 384,-82 25,277 25,421 79,475 79,1127 -132,1338 -132,1385 -122,1395 167,1395 377,1185 377,394 442,394 551,285 551,-11 669,-129 847,-129 891,-173 891,-297 898,-304 1335,-304 1553,-86 1553,369 1708,524 1708,1139 1528.12,1318.88 1528.12,1906.12 1604,1982 1841,1982 1903,1920 1903,1791 1878,1766 1676,1766 1676,1398 1858,1216 1858,-370 1504,-724
12V_PCIE on Layer 3 "12V_PCIE_L03_P017" (solid, remove dead copper, pour order 17): -851,1630 -424,1630 79,1127 79,475 25,421 25,277 384,-82 384,-723 -369,-723 -369,279 -852,279 -871,298 -871,1610
GND on Layer 2 "GND_L02_P006" (solid, remove dead copper, pour order 6): -871,3082 -871,-723 3033,-723 3033,3082

## Other copper
Top Layer:
  pour cut-out: 1921,2510.48 1921,2207 2569,2207 2569,2509.48
  pour cut-out: 2155,2030 2155,1869 2156,1868 2157,1869 2313,1869 2317,1873 2316,1874 2316,2028
  pour cut-out: -849,1114 -773.84,1189.16 -568.84,1189.16 -547,1211 -546,1210 -399,1210 -298,1109 -295.63,1111.37 -156.72,1111.37 -156.72,1099.72 69,874 69,342 -465.91,342 -870,342 -870,1092 -871,1093
  pour cut-out: 701,2756 79,2134 79,1487 164,1402 190,1428 592.22,1428 1530,2365.78 1530,2412 1524,2412 1493,2443 1493,2565 1316,2565 1311,2570 1310,2569 964,2569 964,2677 883,2758
Bottom Layer:
  pour cut-out: 1921,2510.48 1921,2207 2569,2207 2569,2509.48
  pour cut-out: 102,1104 102,516 187,431 591,431 666,356 667,357 715,357 715,390 716,391 616,491 370,491 266,595 259,595 259,1085 242,1102 205,1102
  pour cut-out: -848.67,1114.33 -74.33,1114.33 41,999 41,668 -348,279 -852,279 -871,298 -870.5,298.5 -870.5,1092.5
  pour cut-out: 1363,3010 1363,2916 1502,2777 1649,2777 1741,2869 1732,2878 1732,3033 1398,3033 1396,3031
  pour cut-out: 524.5,2607 524.5,2367 671.5,2220 671.5,2145 1221.5,2145 1115.5,2251 1115.5,2683 1099.5,2699 562.5,2699
Multi-Layer:
  pour cut-out: 1922,3082 1920,3080 1920,2509 2568,2509 2568,3081
  pour cut-out: -850.9,1629.11 -850.01,1630 -653,1630 -653,278 -654,279 -852,279 -871,298 -871,1609.01

## Silkscreen, mask and mechanical layers (free items; w line width, h text height)
Top Overlay:
  drawing of 85 lines, arcs and shapes, not listed
  text "RST" at 85,2674 h20 r270
  text "Internet" at 2642,2664 h60 r270
  text "LCD" at 501,2661 h60
  text "HDMI OUT" at 1196.06,2256.49 h60
  text "PCIE X4" at -315,1214 h60 r270
  text "Xilinx XC7A35T" at 1931,1039 h60
  text "V3.0" at 1929,917 h60
  text "SD" at 2200,-29 h60
  text "+3.3" at 91,-106 h20
  text "+5" at 109,-174 h20
  text "USB" at 1433,-219 h60
  text "GND R06 Y06 W07 Y07 Y08 W09 Y09 AB8 R02 R03 T03 AB18AA18AA19AB20N13 N14 P16 R17 R18 W20 W22 P20 V22 U22 U21 T21 N20 M20 N22 M22 3V3 5VV" at 2779,-494 h25.5 r90
  text "3V3 T06 V08 V09 T04 T05 U05 V04 V05 U06 U07 V07 N15 R14 P14 P15 R16 W17 V17 Y18 Y19 V20 U20 W21 M17 P17 N17 M18 L18 N18 N19 L21 GND GND" at 2822,-494 h25.5 r90
Bottom Overlay:
  lines w10: 2380,1854 2368,1866 ; 2382,1880 2368,1866 ; 2473,1842 2443,1842 2419,1866 2368,1866
  text "CLK" at 2229,2040 h20 r270
  text "INT" at 2484,1712 h20
  text "GPIO" at 334,1317 h60
  text "OV5640" at 2555,475 h60
Top Solder:
  region: -851,1630 -653,1630 -653,279 -852,279 -871,298 -872,298 -871,299 -871,1609
Bottom Solder:
  region: -851,1631 -653,1631 -653,280 -852,280 -871,299 -872,299 -871,300 -871,1610
Mechanical 1:
  circle w10: c2696.85,-551.18 r62.5
  circle w10: c2696.85,2913.39 r62.5
  circle w10: c1760,2358 r62.5
  circle w10: c1760,0 r62.5
  circle w10: c0,0 r62.5
  circle w10: c0,2358 r62.5
  circle w10: c-531,1932 r62.5
  circle w10: c-551.18,2952.76 r62.5
  lines w10: -871,298 -852,279 -369,279 -369,-723 3033,-723 3033,3082 -693,3082 -693,2811 -691,2809 -370,2809 -369,2808 -369,2089 -370,2088 -694,2088 -694,1774 -441,1774 cw(c-441,1701.99) -441,1629.99 -851.01,1629.99 -871,1610 -871,1209 -851,1189 -578,1189 cw(c-578,1152) -578,1115 -851,1115 -871,1095 -871,298

## Text inside footprints (layer, text, board x,y; h text height)
DC_IN1: Mechanical 15 "1" at 99.9,-593.25 h25 r90; Mechanical 15 "5" at -285.9,-593.25 h25 r90; Mechanical 15 "3" at -252.4,-307.75 h25 r90; Mechanical 15 "2" at -43.8,-307.75 h25 r90; Mechanical 15 "4" at 82.2,-307.75 h25 r90
U8: Mechanical 9 "2" at 698.41,2619 h30 r180; Mechanical 9 "4" at 800.77,2656.4 h30 r180; Mechanical 9 "1" at 698.41,2581.6 h30 r180; Mechanical 9 "5" at 800.77,2581.6 h30 r180; Mechanical 9 "3" at 698.41,2656.4 h30 r180
U11: Top Overlay "Cd" at 1971.64,-178.32 h30 r270; Top Overlay "8" at 2024.64,-200.32 h30; Top Overlay "7" at 2068.64,-201.32 h30; Top Overlay "6" at 2110.64,-201.32 h30; Top Overlay "5" at 2152.64,-201.32 h30; Top Overlay "4" at 2194.64,-202.32 h30; Top Overlay "3" at 2241.64,-202.32 h30; Top Overlay "2" at 2283.64,-202.32 h30; Top Overlay "1" at 2326.64,-203.32 h30
U12: Mechanical 13 "41" at 2230.89,1958.29 h19.68 r270; Mechanical 13 "1" at 2301.76,2041.95 h19.68 r270; Mechanical 13 "10" at 2160.03,2045.89 h19.68 r270; Mechanical 13 "11" at 2140.34,2027.19 h19.68 r270; Mechanical 13 "20" at 2140.34,1887.43 h19.68 r270; Mechanical 13 "21" at 2160.03,1868.72 h19.68 r270; Mechanical 13 "30" at 2301.76,1870.69 h19.68 r270; Mechanical 13 "31" at 2320.46,1886.44 h19.68 r270; Mechanical 13 "40" at 2320.46,2026.2 h19.68 r270